# EAGLE board Motorcontroller (EAGLE 9.6.2)

Size 100 x 80 mm. Coordinates in mm from the lower left corner, seen from the top.
Outline: 100,0 100,80 0,80 0,25.15
Outline: 0,25.15 0,24.89 0,0 0.25,0.25 59.94,0.25 59.94,24.89 59.69,25.15 0,25.15
Copper layers (1*16): Top 0.035mm / dielectric 1.5mm / Bottom 0.035mm
Design rules "default": minimum track width 6mil, minimum drill 0.35mm, track to track 6mil, track to pad 6mil, pad to pad 6mil, via to via 6mil, smd to smd 6mil, copper to edge 40mil, drill to drill 6mil, minimum pad ring 10mil, minimum via ring 8mil, stop-mask expansion 4mil, vias tented up to drill 0mil, thermal gap 10mil

## Footprints (pad centres in the part's own frame; a part is rotated, then mirrored left to right if it is on the bottom)
E1,8-4 = drill 0.711 pad 1.168: + -0.889,0 | drill 0.711 pad 1.168 octagon: - 0.889,0
TERMBLK_508-4N = drill 1.2: 1 0,0; 2 5.08,0; 3 10.16,0; 4 15.24,0
DO214AC = smd 1.8 x 1.7: A 2.05,0; C -2.05,0
TERMBLK_508-2N = drill 1.2: 1 0,0; 2 5.08,0
DIL16 = drill 0.813 long: 1 -8.89,-3.81; 2 -6.35,-3.81; 3 -3.81,-3.81; 4 -1.27,-3.81; 5 1.27,-3.81; 6 3.81,-3.81; 7 6.35,-3.81; 8 8.89,-3.81; 9 8.89,3.81; 10 6.35,3.81; 11 3.81,3.81; 12 1.27,3.81; 13 -1.27,3.81; 14 -3.81,3.81; 15 -6.35,3.81; 16 -8.89,3.81
TO220V = drill 1.016 long: 1 -2.54,-2.54; 2 0,-2.54; 3 2.54,-2.54
LED5MM = drill 0.813 octagon: A -1.27,0; K 1.27,0
R1206 = smd 1.6 x 1.803: 1 -1.422,0; 2 1.422,0

## Placement (x,y rotation side)
C1  10u  [E1,8-4]  -24.13,69.85 0 top  (outside the outline)
C2  10u  [E1,8-4]  -33.02,69.85 0 top  (outside the outline)
CONTROLAB  2828XX-4282837-4  [TERMBLK_508-4N]  8.89,19.05 0 top
D1  [DO214AC]  -39.37,69.85 0 top  (outside the outline)
D2  [DO214AC]  -45.72,69.85 0 top  (outside the outline)
D3  [DO214AC]  -52.07,69.85 0 top  (outside the outline)
D4  [DO214AC]  -16.51,76.2 0 top  (outside the outline)
D5  [DO214AC]  -22.86,76.2 0 top  (outside the outline)
D6  [DO214AC]  -29.21,76.2 0 top  (outside the outline)
D7  [DO214AC]  -35.56,76.2 0 top  (outside the outline)
D8  [DO214AC]  -41.91,76.2 0 top  (outside the outline)
ENABLE  2828XX-2282837-2  [TERMBLK_508-2N]  -27.94,21.59 0 top  (outside the outline)
IC1  L293D  [DIL16]  -24.13,62.23 0 top  (outside the outline)
IC2  7805TV  [TO220V]  -41.91,66.04 0 top  (outside the outline)
LED1  [LED5MM]  -55.88,60.96 0 top  (outside the outline)
MOTOROUT  2828XX-4282837-4  [TERMBLK_508-4N]  78.74,15.24 0 top
POWER  2828XX-2282837-2  [TERMBLK_508-2N]  -27.94,49.53 0 top  (outside the outline)
R2  1k  [R1206]  -15.24,71.12 0 top  (outside the outline)

## Library data of the parts
C1 C2 = rcl; SPICEPREFIX: C
CONTROLAB MOTOROUT = Connector; CATEGORY: Fixed Terminal Blocks; DESCRIPTION: Fixed Terminal Blocks 5.08MM PCB MOUNT 4P; MANUFACTURER: TE Connectivity AMP Connectors; MPN: 282837-4; OPERATING_TEMPERATURE: -40°C ~ 105°C; PART_STATUS: Active; PITCH: 0.200" (5.08mm); ROHS_COMPLIANCE: RoHS Compliant; SERIES: Buchanan; SUBCATEGORY: Terminal Blocks; TYPE: Through Hole; Screw - Rising Cage Clamp; Side wire entry, Horizontal with Board
D1-D8 = diode
ENABLE POWER = Connector; CATEGORY: Connector; DESCRIPTION: 2 Position Wire to Board Terminal Block Horizontal with Board 5.08 mm Through Hole; MANUFACTURER: TE Connectivity; MPN: 282837-2; OPERATING_TEMPERATURE: -40°C to +105°C; PART_STATUS: ACTIVE; ROHS_COMPLIANCE: RoHS Compliant; SERIES: 282837; SUBCATEGORY: Terminal Block; TYPE: Side Wire Entry
IC1 = st-microelectronics; MPN: L293D; OC_FARNELL: 9589619; OC_NEWARK: 56P8249
IC2 = linear
LED1 = led
R2 = rcl; SPICEPREFIX: R

## Nets
1-2EN: ENABLE.1 IC1.1
1A: CONTROLAB.1 IC1.2
1Y: D1.A D5.C IC1.3 MOTOROUT.1
2A: CONTROLAB.2 IC1.7
2Y: D2.A D6.C IC1.6 MOTOROUT.2
3-4EN: ENABLE.2 IC1.9
3A: CONTROLAB.3 IC1.10
3Y: D3.A D7.C IC1.11 MOTOROUT.3
4A: CONTROLAB.4 IC1.15
4Y: D4.A D8.C IC1.14 MOTOROUT.4
+5V: C1.+ C2.+ D1.C D2.C D3.C D4.C IC1.8 IC1.16 IC2.1 IC2.3 POWER.1 R2.2
GND: D5.A D6.A D7.A D8.A IC1.4 IC1.5 IC1.12 IC1.13 POWER.2
N$1: C1.- C2.- IC2.2 LED1.K
N$2: LED1.A R2.1

## Tracks (layer width: path | path; a pad name or v marks a point on that pad's centre or on a via)
1-2EN  (1 unrouted)
1A  (1 unrouted)
1Y  (3 unrouted)
2A  (1 unrouted)
2Y  (3 unrouted)
3-4EN  (1 unrouted)
3A  (1 unrouted)
3Y  (3 unrouted)
4A  (1 unrouted)
4Y  (3 unrouted)
+5V  (11 unrouted)
GND  (8 unrouted)
N$1  (3 unrouted)
N$2  (1 unrouted)